# Altium PCB PumpInterface.PcbDoc
Units mm, origin at the board's own origin, x right, y up, seen from the top; angles counter-clockwise.
Board outline 38.1 x 17.78 mm, 4 copper layers (Top Layer 1, Top Layer 2, Bottom Layer 3, Bottom Layer 4), stack 0.603 mm thick; 36 components, 38 nets, 163 pads, 54 vias.
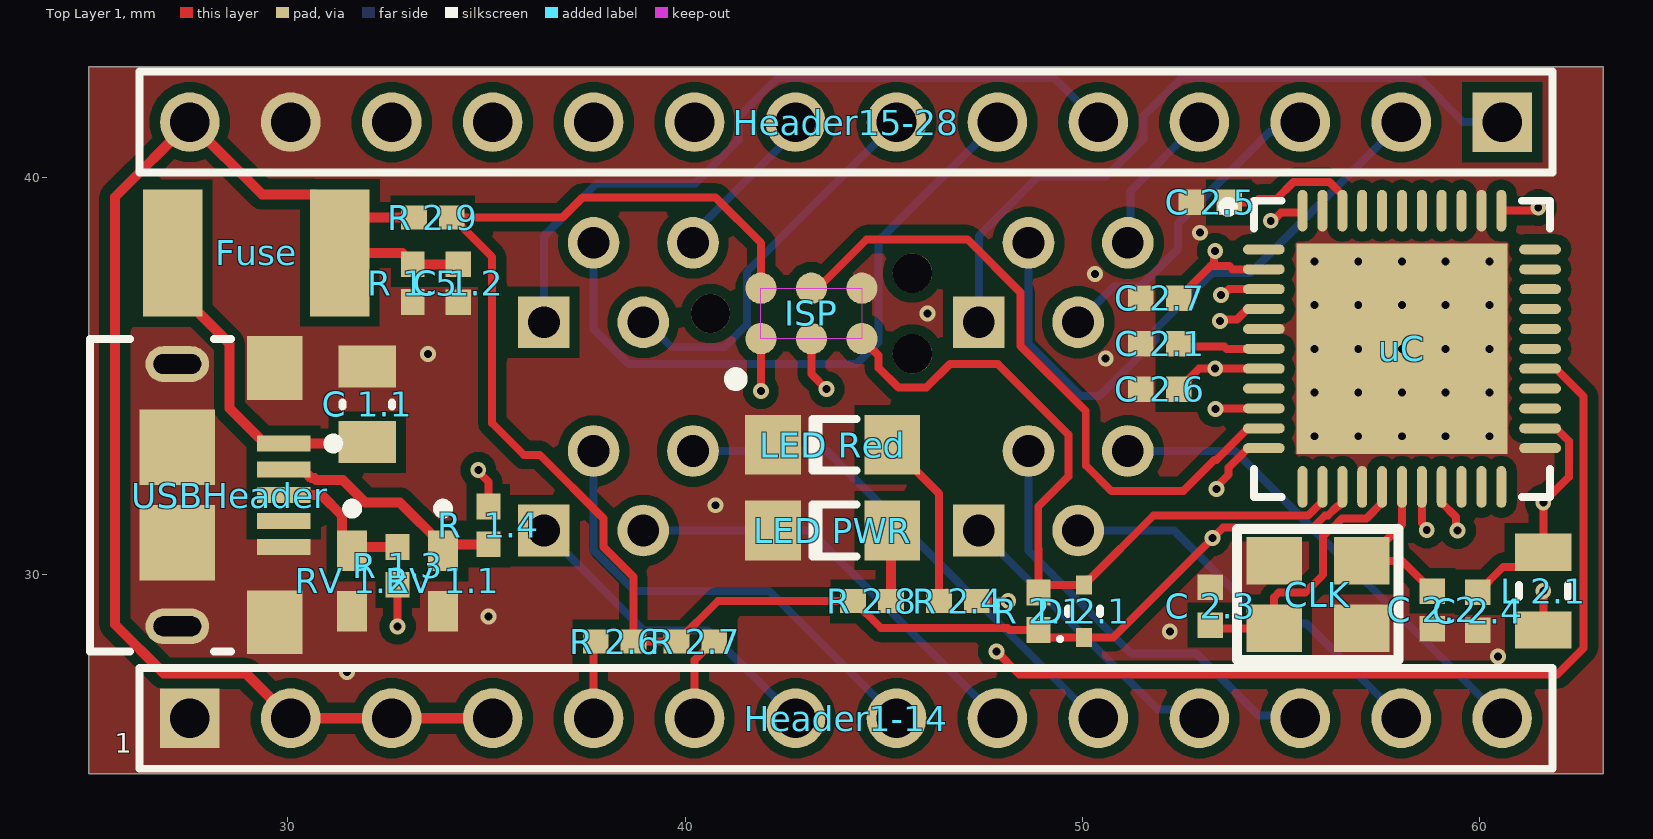
[diagram p0: Top Layer 1 view]
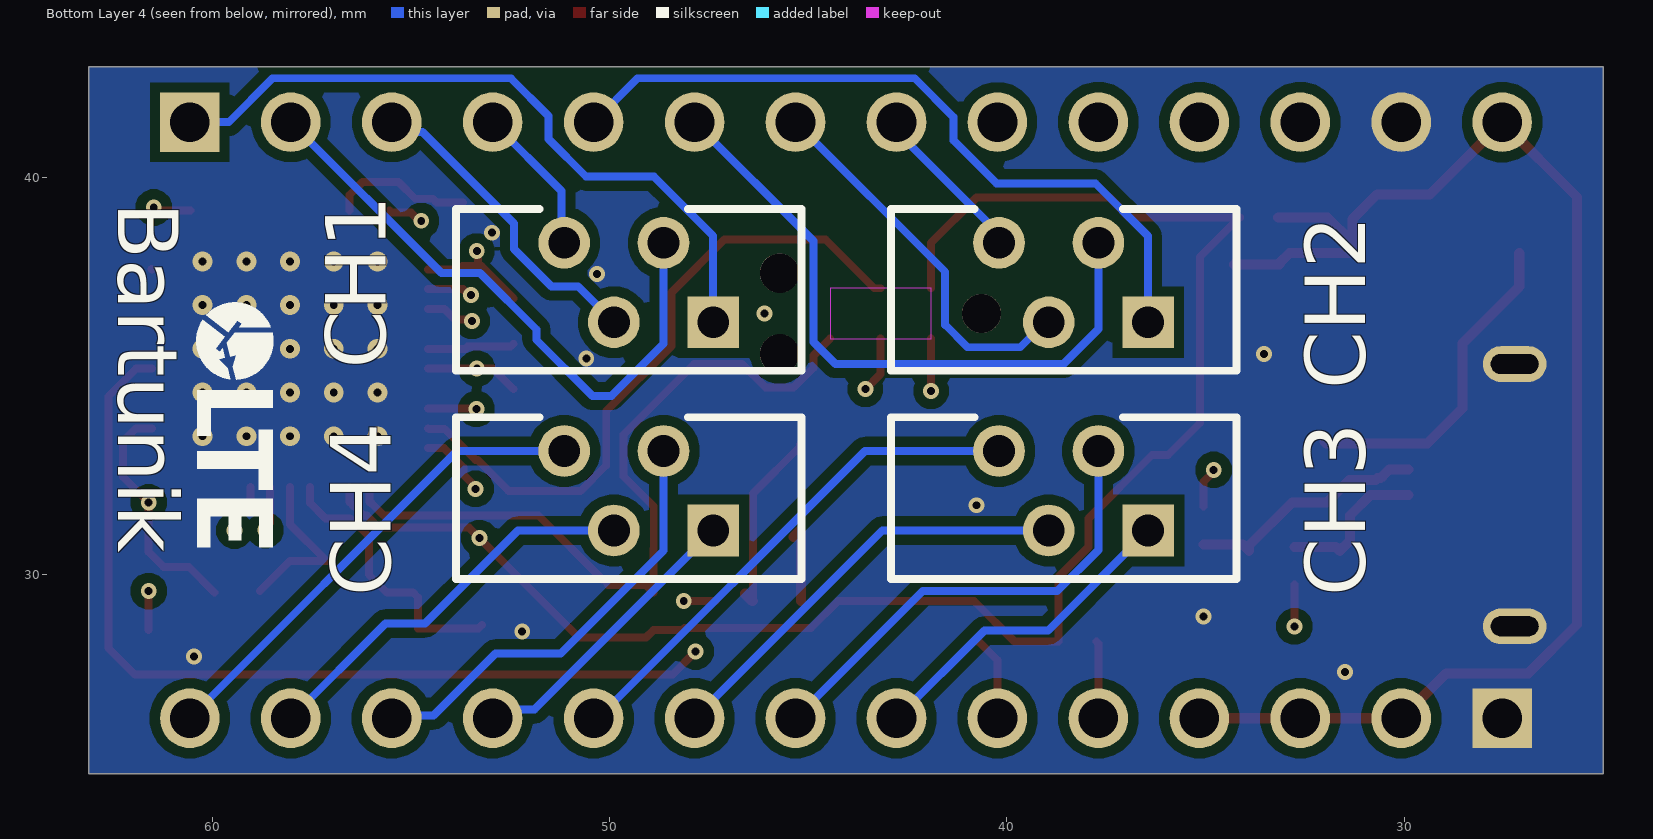
[diagram p1: Bottom Layer 4 view, seen from below]
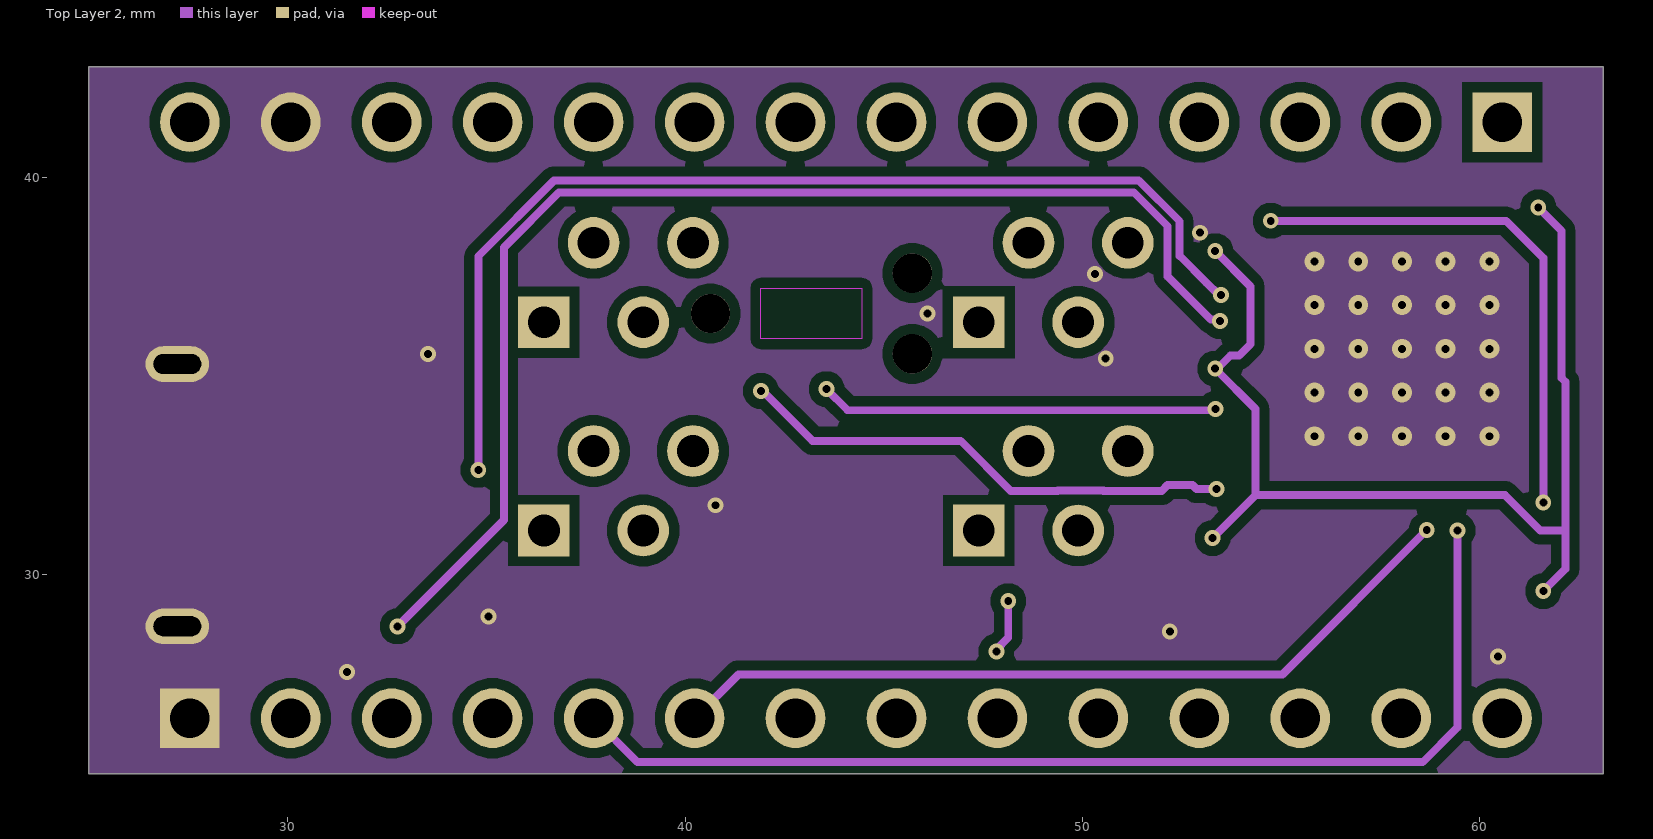
[diagram p2: Top Layer 2]
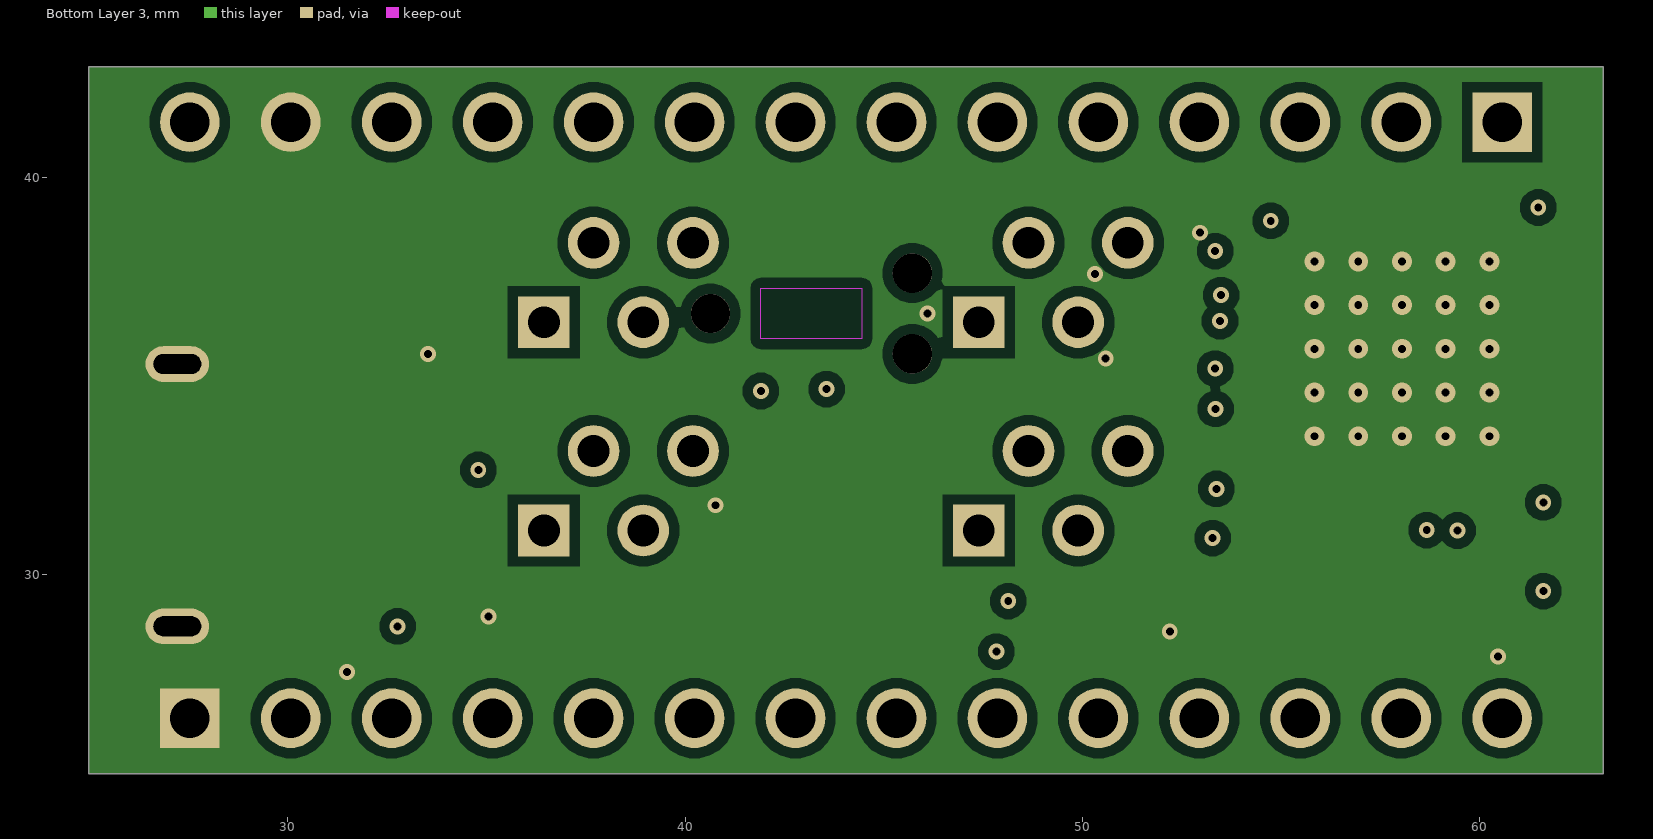
[diagram p3: Bottom Layer 3]

## Layer stack, top to bottom
Top Solder: solder mask 0.0102, Solder Resist, Dk 3.5
Top Layer 1: signal copper 0.035
Dielectric 2: prepreg 0.0711, PP-006, Dk 4.1
Top Layer 2: signal copper 0.0356
Dielectric 1: dielectric 0.32, FR-4, Dk 4.8
Bottom Layer 3: signal copper 0.0356
Dielectric 3: prepreg 0.0711, PP-006, Dk 4.1
Bottom Layer 4: signal copper 0.035
Bottom Solder: solder mask 0.0102, Solder Resist, Dk 3.5

## Board outline
25,25 25,42.78 63.1,42.78 63.1,25

## Design rules (kind name [scope] priority, off if disabled: settings)
Clearance [All] p1: gap=0.254 ignorepadtopadclearanceinfootprint=FALSE except(0: Arc-Hole Track-Hole SMDPad-Hole THPad-Hole Via-Hole Fill-Hole Poly-Hole Region-Hole Text-Hole; 0.1: Arc-Arc Arc-Track Arc-SMDPad Track-Track Track-SMDPad SMDPad-SMDPad)
PolygonConnect [All] p1: connectstyle=Direct reliefconductorwidth=0.254 reliefentries=4 polygonreliefangle="90 Angle" airgapwidth=0.254
RoutingVias [All] p1: holewidth=0.711 width=1.27 viastyle="Through Hole" minholewidth=0 minwidth=0 maxholewidth=0.711 maxwidth=1.27
SolderMaskExpansion [All] p1: expansion=0.102 istentingtop=FALSE
Width [All] p1: maxlimit=0.254 minlimit=0.1 preferedwidth=0.254 minimp=50.000000 maximp=50.000000 favimp=50.000000
30 further rules are at their usual default settings.

## Classes and differential pairs
component class Main: Bartunik
component class U_Highdriver: CH1 CH2 CH3 CH4 Header1-14 Header15-28
component class U_USB: "C 1.1" "C 1.2" Fuse "R 1.3" "R 1.5" "R  1.4" "RV 1.1" "RV 1.2" USBHeader
component class U_ATMega32U4: "C 2.1" "C 2.2" "C 2.3" "C 2.4" "C 2.5" "C 2.6" "C 2.7" CLK "D 2.1" ISP "L 2.1" "LED PWR" "LED Red" "R 2.1" "R 2.4" "R 2.6" "R 2.7" "R 2.8" "R 2.9" uC

## Components (designator, comment, footprint, x,y, rotation, side; value= is the part's Value field where it differs from the comment)
Bartunik "Gültig ab 5.3.18!!!" lteLogoNeu_6mm 59.436,33.655 r270 bottom
"C 1.1" "0805" C0805_M 32.004,34.29 r270 top value=22u
"C 1.2" "0402" C0402_M 34.29,37.338 r90 top value=100n
"C 2.1" "0402" C0402_M 51.943,35.814 r180 top value=1u
"C 2.2" "0402" C0402_M 58.801,29.116 r90 top value=22p
"C 2.3" "0402" C0402_M 53.213,29.21 r270 top value=22p
"C 2.4" "0402" C0402_M 59.944,29.083 r90 top value=1u
"C 2.5" "0402" C0402_M 53.213,39.37 r180 top value=100n
"C 2.6" "0402" C0402_M 51.943,34.671 r0 top value=100n
"C 2.7" "0402" C0402_M 51.943,36.957 r0 top value=100n
CH1 "39-53-2045" MOLX-39-53-2045 47.391,36.354 r0 bottom
CH2 "39-53-2045" MOLX-39-53-2045 36.449,36.354 r0 bottom
CH3 "39-53-2045" MOLX-39-53-2045 36.449,31.115 r0 bottom
CH4 "39-53-2045" MOLX-39-53-2045 47.391,31.115 r0 bottom
CLK "7M-16.000MAAE-T" 7M-16.000MAAE-T 55.923,29.503 r180 top
"D 2.1" "NSV1SS400T1G" ONSC-SOD-523-2-502-01_V 50.038,29.083 r90 top
Fuse "MF-MSMF050-2" BOUR-MF-MSMF050-2_V 29.21,38.1 r0 top
Header1-14 "PH1x14" PH2,54mm-1x14 27.54,26.39 r0 top locked
Header15-28 "PH1x14" PH2,54mm-1x14 60.56,41.39 r180 top locked
ISP "TC2030-IDC-NL" TAG_TC2030-IDC-NL 43.18,36.576 r0 top
"L 2.1" "MH2029-300Y" L0805_M 61.595,29.591 r270 top value=100n
"LED PWR" "150120BS75000" 1206_A 43.712,31.115 r0 top
"LED Red" "150120RS75000" 1206_A 43.712,33.274 r0 top
"R 1.3" "0402" R0402_M 32.766,30.226 r270 top value=22R
"R 1.5" "0402" R0402_M 33.147,37.338 r90 top value=10k
"R 2.1" "0402" R0402_M 48.895,29.083 r270 top value=10k
"R 2.4" "0402" R0402_M 46.863,29.337 r0 top value=1k
"R 2.6" "0402" R0402_M 38.227,28.321 r0 top value=4K7
"R 2.7" "0402" R0402_M 40.259,28.321 r180 top value=4K7
"R 2.8" "0402" R0402_M 44.704,29.337 r180 top value=1k
"R 2.9" "0402" R0402_M 33.655,38.989 r180 top value=0R
"R  1.4" "0402" R0402_M 35.052,31.242 r90 top value=22R
"RV 1.1" "CG0603MLC-05E" BOUR-CG0603-2_V 33.909,29.845 r270 top
"RV 1.2" "CG0603MLC-05E" BOUR-CG0603-2_V 31.623,29.845 r270 top
uC "ATmega32U4-MU" 44PW_M 58.039,35.687 r0 top
USBHeader "10118193-0001LF" FCI-10118193-0001LF-5_V 28.575,32.004 r270 top

## Footprints (in the part's own frame and the unit in brackets; to place one, negate y for a bottom-side part, rotate by r counter-clockwise, add the part's x,y. Pads: shape width x height; smd on the part's side, far side on the other; paste and mask are expansions set on the pad)
7M-16.000MAAE-T [mm]
  rect 1.4x1.2 smd: 1(-1.1,-0.85) 2(1.1,-0.85) 3(1.1,0.85) 4(-1.1,0.85)
  silkscreen extent -2.03,-1.65 2.03,1.65
44PW_M [mm] "QFN, 44-Leads, Body 7x7mm, Pitch 0.5mm, Thermal Pad 5.3x5.3mm, IPC Low Density"
  oval 1.05x0.25 smd: 1(-3.475,2.5) 2(-3.475,2) 3(-3.475,1.5) 4(-3.475,1) 5(-3.475,0.5) 6(-3.475,0) 7(-3.475,-0.5) 8(-3.475,-1) 9(-3.475,-1.5) 10(-3.475,-2) 11(-3.475,-2.5) 23(3.475,-2.5) 24(3.475,-2) 25(3.475,-1.5) 26(3.475,-1) 27(3.475,-0.5) 28(3.475,0) 29(3.475,0.5) 30(3.475,1) 31(3.475,1.5) 32(3.475,2) 33(3.475,2.5)
  oval 0.25x1.05 smd: 12(-2.5,-3.475) 13(-2,-3.475) 14(-1.5,-3.475) 15(-1,-3.475) 16(-0.5,-3.475) 17(0,-3.475) 18(0.5,-3.475) 19(1,-3.475) 20(1.5,-3.475) 21(2,-3.475) 22(2.5,-3.475) 34(2.5,3.475) 35(2,3.475) 36(1.5,3.475) 37(1,3.475) 38(0.5,3.475) 39(0,3.475) 40(-0.5,3.475) 41(-1,3.475) 42(-1.5,3.475) 43(-2,3.475) 44(-2.5,3.475)
  rect 5.3x5.3 smd: 45(0,0)
  silkscreen extent -4.5,-3.73 3.73,3.72, body extent -3.57,-3.58 3.58,3.57, height 0.9
1206_A [mm] "Chip LED, 2-Leads, Body 3.2x1.6mm, IPC Medium Density"
  rect 1.4x1.5 smd: 1(-1.5,0) 2(1.5,0)
  silkscreen extent -0.5,-0.67 0.6,0.65, body extent -1.6,-0.8 1.6,0.8, height 0.68
BOUR-CG0603-2_V [mm] "SMD, 2-Leads, Body 1.6x0.8mm, Pitch 1.52mm"
  rect 1.02x0.76 smd: 1(-0.76,0) 2(0.76,0)
  silkscreen extent -1.94,-0.12 -1.7,0.13, body extent -0.8,-0.4 0.8,0.4, height 0.55
BOUR-MF-MSMF050-2_V [mm] "SMD, 2-Leads, Body 4.55x3.24mm"
  rect 1.5x3.2 smd: 1(-2.1,0) 2(2.1,0)
  body extent -2.28,-1.62 2.28,1.62, height 0.85
C0402_M [mm] "Cap 0402(M1005) Medium Density"
  rect 0.64x0.64 smd: 1(-0.475,0) 2(0.475,0)
  body extent -0.56,-0.3 0.56,0.3, height 0.56
C0805_M [mm] "Cap 0805(M2012) Medium Density"
  rect 1.05x1.45 smd: 1(-0.95,0) 2(0.95,0)
  silkscreen extent -0.05,-0.63 0.05,0.63, body extent -1.07,-0.7 1.07,0.7, height 1.4
FCI-10118193-0001LF-5_V [mm] "Micro, USB-B, 5-Leads, Body 7.86x5.05mm, Pitch 0.65 mm"
  rect 0.4x1.35 smd: 1(-1.3,1.325) 2(-0.65,1.325) 3(0,1.325) 4(0.65,1.325) 5(1.3,1.325)
  rect 1.6x1.4 smd: 6(-3.2,1.1) 7(3.2,1.1)
  rect 1.9x1.9 smd: 8(-1.2,-1.35) 9(1.2,-1.35)
  oval 0.9x1.6 hole 0.5 slot 1.2 at 90 deg: 10(-3.3,-1.35) 11(3.3,-1.35)
  silkscreen extent -3.93,-3.55 3.93,2.7, body extent -3.93,-4.16 3.93,1.5, height 2.83
L0805_M [mm] "Inductor 0805(M2012) Medium Density"
  rect 0.94x1.43 smd: 1(-0.98,0) 2(0.98,0)
  silkscreen extent -0.15,-0.62 0.15,0.62, body extent -1.07,-0.7 1.07,0.7, height 0.6
lteLogoNeu_6mm [mm]
  silkscreen extent -3.2,-0.96 2.97,0.98
MOLX-39-53-2045 [mm] "FPC Connector, 4-Leads, Vertical, Pitch 1.25 mm, Mated Height 7.5 mm, Through Hole"
  rect 1.3x1.3 hole 0.8: 1(0,0)
  round 1.3 hole 0.8: 2(1.25,-2) 3(2.5,0) 4(3.75,-2)
  silkscreen extent -2.22,-2.85 6.47,1.22, body extent -3.25,-2.85 7.5,2.15, height 7.51
ONSC-SOD-523-2-502-01_V [mm] "SOD, 2-Leads, Body 1.2x0.8mm"
  rect 0.48x0.4 smd: 1(-0.66,0) 2(0.66,0)
  silkscreen extent -0.75,-0.4 0.07,0.65, body extent -0.6,-0.4 0.6,0.4, height 0.7
PH2,54mm-1x14 [mm] "Pin header, vertical, 2.54mm, pitch, single row"
  rect 1.5x1.5 hole 1: 1(0,0)
  round 1.5 hole 1: 2(2.54,0) 3(5.08,0) 4(7.62,0) 5(10.16,0) 6(12.7,0) 7(15.24,0) 8(17.78,0) 9(20.32,0) 10(22.86,0) 11(25.4,0) 12(27.94,0) 13(30.48,0) 14(33.02,0)
  silkscreen extent -1.27,-1.27 34.29,1.27, body extent -1.27,-1.27 34.29,1.27, height 8.57
R0402_M [mm] "Res 0402(M1005) Medium Density"
  rect 0.65x0.6 smd: 1(-0.475,0) 2(0.475,0)
  body extent -0.56,-0.3 0.56,0.3, height 0.35
TAG_TC2030-IDC-NL [mil]
  round 30.98 smd paste-39.37: 1(-50,-25) 2(-50,25) 3(0,-25) 4(0,25) 5(50,-25) 6(50,25)
  round 39.02 hole 39.02 unplated: ""(-100,0) ""(100,-40) ""(100,40)
  Keep-Out Layer region: 50,-25.03 -50.05,-25.03 -50.05,25 50,25
  Keep-Out Layer region: 50,-25.03 -50.06,-25.03 -50.06,25 50,25
  silkscreen extent -81,-71 -69,-59

## Part data
Bartunik: library part ltelogoNEU, Manufactor=LTE, Part Number=ltelogoNEU, Supplier 1=LTE
"C 1.1": library part C0805_X5R_22u_20%, "Capacitor", Manufactor=Walsin, ManufactorPartNumber=0805X226M6R3CT, Supplier Part Number 1=2497053, TempRating="-55°C to +125°C", Tolerance=20%, VoltageRating=6.3V, Part Number=C0805_X5R_22u_20%, Supplier 1=Farnell, Tech="MLCC X5R", Type=Capacitor
"C 1.2" "C 2.5" "C 2.6" "C 2.7": library part C0402_X7R_100n_10%, "Capacitor", Manufactor=Yageo, ManufactorPartNumber=CC0402KRX7R7BB104, Supplier Part Number 1=9402047, TempRating="-55°C to +125°C", Tolerance=10%, VoltageRating=16V, Part Number=C0402_X7R_100n_10%, Supplier 1=Farnell, Tech="MLCC X7R", Type=Capacitor
"C 2.1" "C 2.4": library part C0402_X5R_1u_10V_WE, "Capacitor", Manufactor="WURTH ELEKTRONIK", ManufactorPartNumber=885012105012, Supplier Part Number 1=732-7489-1-ND, TempRating="-55°C to +125°C", Tolerance=±20%, VoltageRating=10V, Part Number=C0402_X5R_1u_10V_WE, Supplier 1=Digi-Key, Tech=X5R, Type=Capacitor
"C 2.2" "C 2.3": library part C0402_NP0_22p_50V_WE, "Capacitor", Manufactor="WURTH ELEKTRONIK", ManufactorPartNumber=885012005057, Supplier Part Number 1=732-7471-1-ND, TempRating="-55°C to +125°C", Tolerance=±5%, VoltageRating=50V, Part Number=C0402_NP0_22p_50V_WE, Supplier 1=Digi-Key, Tech=NP0, Type=Capacitor
CH1 CH2 CH3 CH4: library part CMP-1242-00004-1, "1.25 mm Pitch FPC Connector, 7.5 mm Mated Height, Vertical, ZIF, Through Hole, 4 Circuits, -20 to 80 degC, ELV and RoHS Compliant, Tray", Current (Max per Contact)=1A, Manufacturer=Molex, Voltage (Max)=200V, Circuits (Loaded)=4, ComponentLink1Description="Manufacturer URL", ComponentLink1URL=http://www.molex.com/molex/index.jsp, ComponentLink2Description=Datasheet, ComponentLink2URL=http://www.molex.com/webdocs/datasheets/pdf/en-us/0039532045_FFC_FPC_CONNECTORS.pdf, ComponentLink3Description="Package Specification", ComponentLink3URL=http://www.molex.com/pdm_docs/sd/039532045_sd.pdf, Contact Position=N/A, Durability (mating cycles max)=30, Entry Angle=Vertical, Mated Height=7.50mm, Material - Metal="Phosphor Bronze", Material - Plating Mating=Tin-Bismuth, Material - Plating Termination=Tin-Bismuth, Mounting Technology="Through Hole", Number of Rows=1, Orientation=Vertical, PackageDescription="4-Lead FPC Connector, Pitch 1.25 mm", PackageReference=39-53-2045, PackageVersion="Rev. A, 12/2004", Packing=Tray, PartNumber=39-53-2045, PCB Locator=No, PCB Retention=None, Pitch - Mating Interface=1.25mm, Polarized to PCB=No, RoHS=TRUE, Stackable=No
"D 2.1": library part CMP-1054-00078-1, "High-Speed Switching Diode, 2-Pin SOD-523, Pb-Free, Tape and Reel", Manufacturer="On Semiconductor", ComponentLink1Description="Manufacturer URL", ComponentLink1URL=http://www.onsemi.com/, ComponentLink2Description=Datasheet, ComponentLink2URL=http://www.onsemi.com/pub_link/Collateral/1SS400T1-D.PDF, ComponentLink3Description="Package Specification", ComponentLink3URL=http://www.onsemi.com/pub_link/Collateral/502-01.PDF, Configuration=Single, DatasheetVersion="Rev. 7", IF Max (A)=0.2, Mounting Technology="Surface Mount", PackageDescription="2-Pin SOD, Body 1.2 x 0.8 mm", PackageReference=SOD-523-2-502-01, PackageVersion="Rev. E, 09/2010", Packing="Tape and Reel", PartNumber=NSV1SS400T1G, RoHS=TRUE, trr Max (ns)=4
Fuse: library part CMP-2100-03653-1, "PTC Resettable Fuse, 15 V, 500 mA, -40 to 85 degC, 2-Pin SMD, RoHS, Tape and Reel", Case Code (Imperial)=1812, Case Code (Metric)=4532, Current Rating=100A, Manufacturer=Bourns, Max Operating Temperature=85degC, Min Operating Temperature=-40degC, Package Description="2-Pin Surface Mount Device, Body 4.55 x 3.24 mm", Package Quantity=2000, Power Dissipation=800mW, Resistance=150mOhm, Supply Voltage=15V, Case/Package=1812, Contact Plating=Gold, Datasheet URL=http://www.bourns.com/docs/Product-Datasheets/mfmsmf.pdf, Datasheet Version="Rev. AG, 08/2016", Height=0.85mm, Lead Free=LeadFree, Length=4.73mm, Manufacturer URL=http://www.bourns.com/, Max Current Rating=100A, Mount=SurfaceMount, Number of Terminals=2, Package Reference=MF-MSMF050-2, Packaging=TapeandReel, Radiation Hardening=No, REACH SVHC=NoSVHC, RoHSCompliant=true, Termination=SMD/SMT, Voltage Rating=15V, Voltage Rating (DC)=15V, Width=3.41mm
Header1-14 Header15-28: library part PH2,54mm-1x14, Part Number=PH2,54mm-1x14
ISP: "6-PIN PLUG-OF-NAILS CABLE 6", Package="Package Analog Devices", Availability=Unavailable, MF=Tag-Connect, MP=TC2030-IDC-NL, Price=None, SnapEDA_Link=https://www.snapeda.com/parts/TC2030-IDC-NL/Tag-Connect/view-part/2783029/?ref=snap
"L 2.1": library part L0805_100n_2%, CurrentRating=400mA, Manufactor=Coilcraft, ManufactorPartNumber=0805CS-101XJLC, Supplier Part Number 1=2286419, TempRating="-40°C bis 125°C", Tolerance=2%, Kind=General, Part Number=L0805_100n_2%, Supplier 1=Farnell
"LED PWR": library part CMP-1426-00015-1, "SMD mono-color Chip LED, WL-SMCW, Blue", Color=Blue, Manufacturer="Wuerth Elektronik", ComponentLink1Description="Manufacturer URL", ComponentLink1URL=http://www.we-online.com, ComponentLink2Description=Datasheet, ComponentLink2URL=http://katalog.we-online.com/led/datasheet/150120BS75000.pdf, PackageReference=1206_A, PartNumber=150120BS75000
"LED Red": library part CMP-1426-00013-1, "SMD mono-color Chip LED, WL-SMCW, Red", Color=Red, Manufacturer="Wuerth Elektronik", ComponentLink1Description="Manufacturer URL", ComponentLink1URL=http://www.we-online.com, ComponentLink2Description=Datasheet, ComponentLink2URL=http://katalog.we-online.com/led/datasheet/150120RS75000.pdf, PackageReference=1206_A, PartNumber=150120RS75000
"R 1.3" "R  1.4": library part R0402_1%_220R, "Resistor", Manufactor=Vishay, ManufactorPartNumber=CRCW0402220RFKEDHP, PowerRating=0,125W, Tolerance=1%, VoltageRating=50V, Part Number=R0402_1%_220R, Tech=Dickschicht, Type=Resistor
"R 1.5" "R 2.1": library part R0402_1%_10k, "Resistor", Manufactor=Vishay, ManufactorPartNumber=CRCW040210K0FKEDHP, PowerRating=0,125W, Supplier Part Number 1=541-10.0KYCT-ND, Tolerance=1%, VoltageRating=50V, Part Number=R0402_1%_10k, Supplier 1=Digi-Key, Supplier 2=Farnell, Supplier Part Number 2=1738864, Tech=Dickschicht, Type=Resistor
"R 2.4" "R 2.8": library part R0402_1%_1k, "Resistor", Manufactor=Vishay, ManufactorPartNumber=CRCW04021K00FKED, PowerRating=0,063W, Supplier Part Number 1=541-1.00KLCT-ND, Tolerance=1%, VoltageRating=50V, Part Number=R0402_1%_1k, Supplier 1=Digi-Key, Supplier 2=Farnell, Supplier Part Number 2=1469662, Tech=Dickschicht, Type=Resistor
"R 2.6" "R 2.7": library part R0402_1%_3k3, "Resistor", Manufactor=Yageo, ManufactorPartNumber=RC0402FR-073K3L, PowerRating=0,0625W, Tolerance=1%, VoltageRating=50V, Part Number=R0402_1%_3k3, Tech=Dickschicht, Type=Resistor
"R 2.9": library part R0402_1%_0R, "Resistor", Manufactor=Multicomp, ManufactorPartNumber=MC00625W040210R, PowerRating=0,0625W, Supplier Part Number 1=1357983, Tolerance=1%, VoltageRating=50V, Part Number=R0402_1%_0R, Supplier 1=Farnell, Tech=Dickschicht, Type=Resistor
"RV 1.1" "RV 1.2": library part CMP-0584-00001-2, "ESD Protector, 5 V Supply, -40 to 85 degC, 1.6 x 0.8 x 0.55 mm SMD, RoHS, Tape and Reel", Manufacturer=Bourns, Operating Temperature="-40 to 85 degC", CO="0.5 pF", ComponentLink1Description="Manufacturer URL", ComponentLink1URL=http://www.bourns.com/, ComponentLink2Description=Datasheet, ComponentLink2URL=http://www.bourns.com/data/global/pdfs/MLC.pdf, DatasheetVersion="Rev. S", Mounting Technology="Surface Mount", PackageDescription="2-Pin SMD, Body 1.6 x 0.8 mm, Pitch 1.52 mm", PackageReference=CG0603-2, Packing="Tape and Reel", PartNumber=CG0603MLC-05E, RoHS=TRUE, RT="1 ns", VC="20 V", VDC="5 V", VT="150 V"
uC: library part CMP-0095-00166-2, "8-bit AVR Microcontroller, 2.7-5.5V, 16MHz, 32KB Flash, 1KB EEPROM, 2.5KB SRAM, USB Controller, 44-pin QFN, Industrial Grade (-40°C to 85°C), Ext Osc", Code_JEDEC=MO-220-VKKD-1, ComponentLink1Description="Manufacturer URL", ComponentLink1URL=http://www.atmel.com/, ComponentLink2Description="ATmega16U4/32U4 Datasheet", ComponentLink2URL=http://www.atmel.com/dyn/resources/prod_documents/doc7766.pdf, ComponentLink3Description="ATmega16U4 ATmega32U4 Summary", ComponentLink3URL=http://www.atmel.com/dyn/resources/prod_documents/7766S.pdf, DatasheetVersion="revF, Nov-2010", PackageDescription="44-Pin Quad Flat No-Lead Package, 7 x 7 mm Body, 0.5 mm Pitch (QFN)", PackageReference=44PW, PackageVersion="revG, Sep-2009", RevisionNote="DatasheetVersion, PackageVersion & PCB updated. URLs added."
USBHeader: library part CMP-2000-05119-1, "Micro USB B Type Receptacle, -55 to 85 degC, 5-Pin SMD, RoHS, Tape and Reel", Color=Black, Current Rating=1.8A, Flammability Rating=UL94V-0, Insulation Resistance=1000MOhms, Manufacturer=FCI, Operating Temperature Range=-55Cto+85C, Brand=FCI, Connector Type=MicroUSBTypeBreceptacle, Contact Material=CopperAlloy, Contact Plating=Gold, Datasheet URL=http://datasheet.octopart.com/10118193-0001LF-FCI-datasheet-55953155.pdf, Datasheet Version="Rev. C, 05/2015", Factory Pack Quantity=1200, Gender=Female, Manufacturer URL=http://www.fci.com/, Mounting Angle=Right, Number of Contacts=5Contact, Packaging=Reel, Product=MicroUSBTypeBConnectors, Product Category=USBConnectors, RoHS=Details, Standard=USB2.0, Termination Style=SMD/SMT

## Via types
v1: diameter 0.4, hole 0.2, Top Layer 1 to Bottom Layer 4, 29 vias
v2: diameter 0.5, hole 0.2, Top Layer 1 to Bottom Layer 4, 25 vias

## Nets (pads, with @x,y where several pads share a name; then routed paths per layer and width w, separated by ;. In a path a pad name is that pad's centre, name@x,y a point inside that pad or via, vN(x,y) a via of type N, cw(c..) or ccw(c..) an arc to the next point about the centre after c; other vN are vias at no path point)
GND: "C 1.1.1" "C 1.2.1" "C 2.1.2" "C 2.2.1" "C 2.3.1" "C 2.4.1" "C 2.5.2" "C 2.6.1" "C 2.7.1" "LED PWR.1" "LED Red.1" "R 1.5.1" "RV 1.1.2" "RV 1.2.2" CLK.2 CLK.4 Header1-14.1 Header15-28.13 ISP.6 uC.5 uC.15 uC.23 uC.35 uC.43 uC.45 USBHeader.5 USBHeader.6 USBHeader.7 USBHeader.8 USBHeader.9 USBHeader.10 USBHeader.11
  other v1: 31.496,27.559 60.452,27.94 52.197,28.575 35.052,28.956 40.767,31.75 50.585,35.439 33.528,35.56 46.101,36.576 50.319,37.565 52.959,38.608
  other v2: 55.839,33.487 56.939,33.487 58.039,33.487 59.139,33.487 60.239,33.487 55.839,34.587 56.939,34.587 58.039,34.587 59.139,34.587 60.239,34.587 55.839,35.687 56.939,35.687 58.039,35.687 59.139,35.687 60.239,35.687 55.839,36.787 56.939,36.787 58.039,36.787 59.139,36.787 60.239,36.787 55.839,37.887 56.939,37.887 58.039,37.887 59.139,37.887 60.239,37.887
"NetC 1.1_2": "C 1.1.2" Fuse.1 USBHeader.1 | length 8.3
  Top Layer 1 w0.254: Fuse.1 27.11,37.25 28.542,35.818 28.542,34.187 29.425,33.304 USBHeader.1 31.968,33.304 32.004,33.34
"NetC 1.2_2": "C 1.2.2" "R 1.5.2" "R 2.9.2" Fuse.2 Header1-14.2 Header1-14.3 Header1-14.4 Header15-28.14 | length 34.8
  Top Layer 1 w0.254: 33.18,38.989 31.933,38.989 Fuse.2@31.31,38.366 ; 34.29,37.813 33.147,37.813 33.147,37.838 32.885,38.1 Fuse.2 Fuse.2@31.31,38.366 ; Header1-14.4 Header1-14.3 Header1-14.2 28.949,27.521 26.883,27.521 25.654,28.75 25.654,39.504 Header15-28.14 29.357,39.573 30.687,39.573 31.31,38.95 Fuse.2@31.31,38.366
"NetC 2.1_1": "C 2.1.1" uC.6 | length 2.2
  Top Layer 1 w0.2: 52.418,35.814 52.491,35.741 53.569,35.741 53.623,35.687 uC.6
"NetC 2.2_2": "C 2.2.2" CLK.1 uC.17 | length 4.3
  Top Layer 1 w0.2: CLK.1 CLK.1@57.123,30.353 ; uC.17 58.039,31.269 CLK.1@57.123,30.353 ; 58.801,29.591 58.039,30.353 CLK.1@57.123,30.353
"NetC 2.3_2": "C 2.3.2" CLK.3 uC.16 | length 7.1
  Top Layer 1 w0.2: 53.213,28.735 53.295,28.653 CLK.3 54.823,29.436 54.94,29.553 55.606,29.553 56.056,30.003 56.056,30.969 56.274,31.187 56.298,31.187 56.53,31.419 57.146,31.419 57.539,31.812 uC.16
"NetC 2.4_2": "C 2.4.2" "L 2.1.1" uC.24 uC.44 | length 20.3
  Top Layer 1 w0.2: v1(54.737,38.908) 54.791,38.908 54.999,39.116 55.516,39.116 55.516,39.139 uC.44 ; 59.944,29.558 60.587,30.201 61.225,30.201 61.595,30.571 v1(61.595,31.823) 62.239,32.467 62.239,33.362 61.914,33.687 uC.24
  Top Layer 2 w0.2: v1(54.737,38.908) 60.66,38.908 61.595,37.973 v1(61.595,31.823)
"NetC 2.5_1": "C 2.5.1" uC.42 | length 3.6
  Top Layer 1 w0.2: 53.688,39.37 54.352,39.37 54.444,39.462 54.888,39.462 55.313,39.887 56.214,39.887 56.539,39.562 uC.42
"NetC 2.6_2": "C 2.6.2" "C 2.7.2" "D 2.1.1" "L 2.1.2" "R 2.1.2" "R 2.6.2" "R 2.7.2" "R 2.8.2" "R 2.9.1" ISP.2 uC.2 uC.7 uC.14 uC.34 | length 77.4
  Top Layer 1 w0.2: 34.13,38.989 34.155,38.989 ; ISP.2 41.91,38.354 40.767,39.497 37.422,39.497 36.914,38.989 34.155,38.989 ; 52.418,34.671 52.934,35.187 v1(53.34,35.187) uC.7 ; 52.418,36.957 53.254,37.793 53.305,37.793 53.305,38.111 v1(53.34,38.146) ; 53.226,37.765 53.696,37.765 53.774,37.687 uC.2 ; uC.14 56.539,31.826 56.433,31.719 56.406,31.719 56.174,31.487 56.098,31.487 55.798,31.187 53.538,31.187 v1(53.276,30.925) 50.774,28.423 50.038,28.423 49.08,28.423 48.895,28.608 48.167,28.608 48.108,28.667 44.924,28.667 44.254,29.337 44.229,29.337 40.825,29.337 39.809,28.321 39.784,28.321 38.702,28.321 38.702,29.942 37.945,30.699 37.945,31.42 36.345,33.02 35.941,33.02 35.148,33.813 35.148,37.996 34.155,38.989 ; uC.34 61.333,39.162 61.414,39.243 v1(61.468,39.243) ; 61.595,28.611 v1(61.595,29.591)
  Top Layer 2 w0.2: v1(53.276,30.925) 54.355,32.004 ; v1(53.34,38.146) 54.229,37.257 54.229,35.804 53.94,35.515 53.719,35.515 53.392,35.187 v1(53.34,35.187) 54.355,34.172 54.355,32.004 ; v1(61.468,39.243) 62.057,38.654 62.057,34.95 62.149,34.858 62.149,31.115 ; v1(61.595,29.591) 62.149,30.145 62.149,31.115 ; 54.355,32.004 60.63,32.004 61.519,31.115 62.149,31.115
NetCH1_1: CH1.1 Header15-28.1 | length 17.8
  Bottom Layer 4 w0.2: CH1.1 47.391,38.524 48.884,40.017 50.589,40.017 51.536,40.964 51.536,41.547 52.483,42.494 58.477,42.494 59.581,41.39 Header15-28.1
NetCH1_2: CH1.2 Header15-28.2 | length 15.5
  Bottom Layer 4 w0.2: CH1.2 48.641,35.814 49.955,34.5 50.429,34.5 51.843,35.914 51.843,36.178 53.257,37.592 54.229,37.592 58.02,41.383 Header15-28.2
NetCH1_3: CH1.3 Header15-28.3 | length 8
  Bottom Layer 4 w0.2: CH1.3 50.788,37.251 51.458,37.251 52.405,38.198 52.405,38.837 54.709,41.141 55.231,41.141 Header15-28.3
NetCH1_4: CH1.4 Header15-28.4 | length 3.8
  Bottom Layer 4 w0.2: CH1.4 51.206,38.419 51.206,39.656 Header15-28.4
NetCH2_1: CH2.1 Header15-28.5 | length 18.6
  Bottom Layer 4 w0.2: CH2.1 36.449,37.692 36.449,38.524 37.776,39.851 40.263,39.851 41.344,40.933 41.344,41.515 42.323,42.494 49.296,42.494 Header15-28.5
NetCH2_2: CH2.2 Header15-28.6 | length 16.7
  Bottom Layer 4 w0.2: CH2.2 37.699,36.184 38.577,35.306 44.316,35.306 44.87,35.86 44.87,38.4 Header15-28.6
NetCH2_3: CH2.3 Header15-28.7 | length 9.8
  Bottom Layer 4 w0.2: CH2.3 39.037,36.354 39.665,35.726 40.992,35.726 41.555,36.289 41.555,37.625 Header15-28.7
NetCH2_4: CH2.4 Header15-28.8 | length 4.1
  Bottom Layer 4 w0.2: CH2.4 40.199,38.582 42.78,41.163 Header15-28.8
NetCH3_1: CH3.1 Header1-14.7 | length 8.3
  Bottom Layer 4 w0.2: CH3.1 38.962,28.602 40.568,28.602 Header1-14.7
NetCH3_2: CH3.2 Header1-14.8 | length 11.9
  Bottom Layer 4 w0.2: CH3.2 37.699,30.627 38.735,29.591 42.119,29.591 Header1-14.8
NetCH3_3: CH3.3 Header1-14.9 | length 10.9
  Bottom Layer 4 w0.2: CH3.3 43.135,31.115 Header1-14.9
NetCH3_4: CH3.4 Header1-14.10 | length 13
  Bottom Layer 4 w0.2: CH3.4 43.572,33.115 50.297,26.39 Header1-14.10
NetCH4_1: CH4.1 Header1-14.11 | length 7.5
  Bottom Layer 4 w0.2: CH4.1 51.89,26.616 52.714,26.616 Header1-14.11
NetCH4_2: CH4.2 Header1-14.12 | length 11.1
  Bottom Layer 4 w0.2: CH4.2 48.641,30.607 51.227,28.021 52.87,28.021 54.43,26.461 55.409,26.461 Header1-14.12
NetCH4_3: CH4.3 Header1-14.13 | length 10.1
  Bottom Layer 4 w0.2: CH4.3 52.303,31.115 54.646,28.772 55.638,28.772 Header1-14.13
NetCH4_4: CH4.4 Header1-14.14 | length 12.2
  Bottom Layer 4 w0.2: CH4.4 53.835,33.115 Header1-14.14
"NetD 2.1_2": "D 2.1.2" "R 2.1.1" ISP.5 uC.13 | length 19.7
  Top Layer 1 w0.2: ISP.5 44.87,35.521 44.87,35.208 45.368,34.71 46.072,34.71 46.667,35.306 47.87,35.306 49.645,33.531 49.645,32.475 48.887,31.717 48.887,30.661 48.895,30.653 48.895,29.558 49.08,29.743 50.038,29.743 50.038,29.783 50.138,29.883 50.178,29.883 51.782,31.487 55.674,31.487 55.989,31.802 56.016,31.802 56.039,31.826 uC.13
NetHeader1-14_5: "R 2.6.1" Header1-14.5 uC.19 | length 30.7
  Top Layer 1 w0.2: Header1-14.5 37.7,28.269 37.752,28.321 ; uC.19 59.039,31.812 59.398,31.453 59.398,31.153 v1(59.436,31.115)
  Top Layer 2 w0.2: Header1-14.5 38.804,25.286 58.56,25.286 59.436,26.162 v1(59.436,31.115)
NetHeader1-14_6: "R 2.7.1" Header1-14.6 uC.18 | length 23.7
  Top Layer 1 w0.2: Header1-14.6 40.24,27.852 40.709,28.321 40.734,28.321 ; uC.18 58.539,31.304 58.663,31.18 v1(58.663,31.126)
  Top Layer 2 w0.2: Header1-14.6 41.344,27.494 55.032,27.494 v1(58.663,31.126)
NetISP_1: ISP.1 uC.11 | length 15.7
  Top Layer 1 w0.2: v1(41.91,34.625) ISP.1 ; v1(53.371,32.162) 53.371,32.216 53.679,32.525 53.679,32.702 54.164,33.187 uC.11
  Top Layer 2 w0.2: v1(41.91,34.625) 41.956,34.625 43.209,33.372 46.935,33.372 48.196,32.111 49.372,32.111 49.38,32.119 50.526,32.119 50.534,32.111 51.996,32.111 52.143,32.258 52.771,32.258 52.867,32.162 v1(53.371,32.162)
NetISP_3: ISP.3 uC.9 | length 12.7
  Top Layer 1 w0.2: ISP.3 43.18,35.052 v1(43.561,34.671) ; v1(53.351,34.174) 53.357,34.18 54.557,34.18 uC.9
  Top Layer 2 w0.2: v1(43.561,34.671) 44.091,34.141 53.318,34.141 v1(53.351,34.174)
NetISP_4: ISP.4 uC.10 | length 16.8
  Top Layer 1 w0.2: ISP.4 43.339,37.211 44.569,38.442 47.104,38.442 48.444,37.102 48.444,35.757 50.082,34.119 50.082,32.754 50.725,32.111 52.537,32.111 53.316,32.891 53.368,32.891 54.148,33.671 54.548,33.671 uC.10
"NetLED PWR_2": "LED PWR.2" "R 2.8.1" | length 2
  Top Layer 1 w0.254: 45.179,29.337 45.179,31.082 45.212,31.115 45.372,30.955
"NetLED Red_2": "LED Red.2" "R 2.4.1" | length 4.7
  Top Layer 1 w0.2: 45.212,33.274 45.212,33.224 46.387,32.049 46.387,30.318 46.388,30.317 46.388,29.337
  Top Layer 1 w0.254: 46.388,29.337 46.413,29.337 46.586,29.51 46.586,29.531
"NetR 1.3_1": "R 1.3.1" "RV 1.2.1" USBHeader.3 | length 3.9
  Top Layer 1 w0.254: USBHeader.3 30.861,32.004 31.37,31.495 31.37,30.858 31.623,30.605 31.719,30.701 32.766,30.701
"NetR 1.3_2": "R 1.3.2" uC.4 | length 33.6
  Top Layer 1 w0.2: v1(32.766,28.702) 32.766,29.751 ; v1(53.46,36.385) 53.499,36.423 53.886,36.423 54.15,36.687 uC.4
  Top Layer 2 w0.2: v1(32.766,28.702) 35.445,31.381 35.445,38.239 36.83,39.624 51.291,39.624 52.145,38.77 52.145,37.507 53.229,36.423 53.422,36.423 v1(53.46,36.385)
"NetR 2.4_2": "R 2.4.2" uC.27 | length 25.2
  Top Layer 1 w0.2: 47.338,29.337 v1(48.133,29.337) ; v1(47.835,28.069) 48.409,27.494 61.946,27.494 62.611,28.159 62.611,34.49 61.914,35.187 uC.27
  Top Layer 2 w0.2: v1(47.835,28.069) 47.835,28.123 48.133,28.421 v1(48.133,29.337)
"NetR  1.4_1": "R  1.4.1" "RV 1.1.1" USBHeader.2 | length 6.1
  Top Layer 1 w0.254: USBHeader.2 30.375,32.654 USBHeader.2@30.448,32.581 ; USBHeader.2@30.448,32.58 30.597,32.431 30.669,32.431 30.715,32.385 31.388,32.385 31.952,31.821 32.823,31.821 33.909,30.735 33.909,30.605 33.974,30.67 34.071,30.767 35.052,30.767
"NetR  1.4_2": "R  1.4.2" uC.3 | length 28.7
  Top Layer 1 w0.2: v1(34.798,32.639) 34.798,32.596 35.052,32.342 35.052,31.717 ; v1(53.487,37.038) 53.541,37.038 53.69,37.187 uC.3
  Top Layer 2 w0.2: v1(34.798,32.639) 34.798,38.016 36.706,39.924 51.415,39.924 52.445,38.894 52.445,38.026 53.113,37.357 53.433,37.038 v1(53.487,37.038)
pads on no net: Header15-28.9 Header15-28.10 Header15-28.11 Header15-28.12 ISP. uC.1 uC.8 uC.12 uC.20 uC.21 uC.22 uC.25 uC.26 uC.28 uC.29 uC.30 uC.31 uC.32 uC.33 uC.36 uC.37 uC.38 uC.39 uC.40 uC.41 USBHeader.4
copper on no net: | length 0
  Top Layer 1 w0.2: 61.514,37.687 61.524,37.697

## Polygon pours and split planes (outlines as drawn)
GND on Top Layer 1 "GND_L01_P001" (solid, remove dead copper, pour order 1): 25,25 63.1,25 63.1,42.78 25,42.78
GND on Top Layer 2 "GND_L02_P000" (solid, remove dead copper, pour order 0): 25,25 63.1,25 63.1,42.78 25,42.78
GND on Bottom Layer 3 "GND_L03_P003" (solid, remove dead copper, pour order 3): 25,25 63.1,25 63.1,42.78 25,42.78
GND on Bottom Layer 4 "GND_L04_P002" (solid, remove dead copper, pour order 2): 25,25 63.1,25 63.1,42.78 25,42.78

## Silkscreen, mask and mechanical layers (free items; w line width, h text height)
Mechanical 15:
  the board outline again, w0.254

## Text inside footprints (layer, text, board x,y; h text height)
CLK: Mechanical 15 "1" at 58.336,30.773 h0.5 r180
Header1-14: Top Overlay "1" at 25.654,25.527 h0.5
Header15-28: Mechanical 15 "1" at 62.484,42.418 h0.5 r180